# Altium PCB PCB1.PcbDoc
Units mil, origin at the board's own origin, x right, y up, seen from the top; angles counter-clockwise.
Board outline 2047.24 x 905.51 mil, 2 copper layers (Top Layer, Bottom Layer); 37 components, 52 nets, 212 pads, 54 vias.
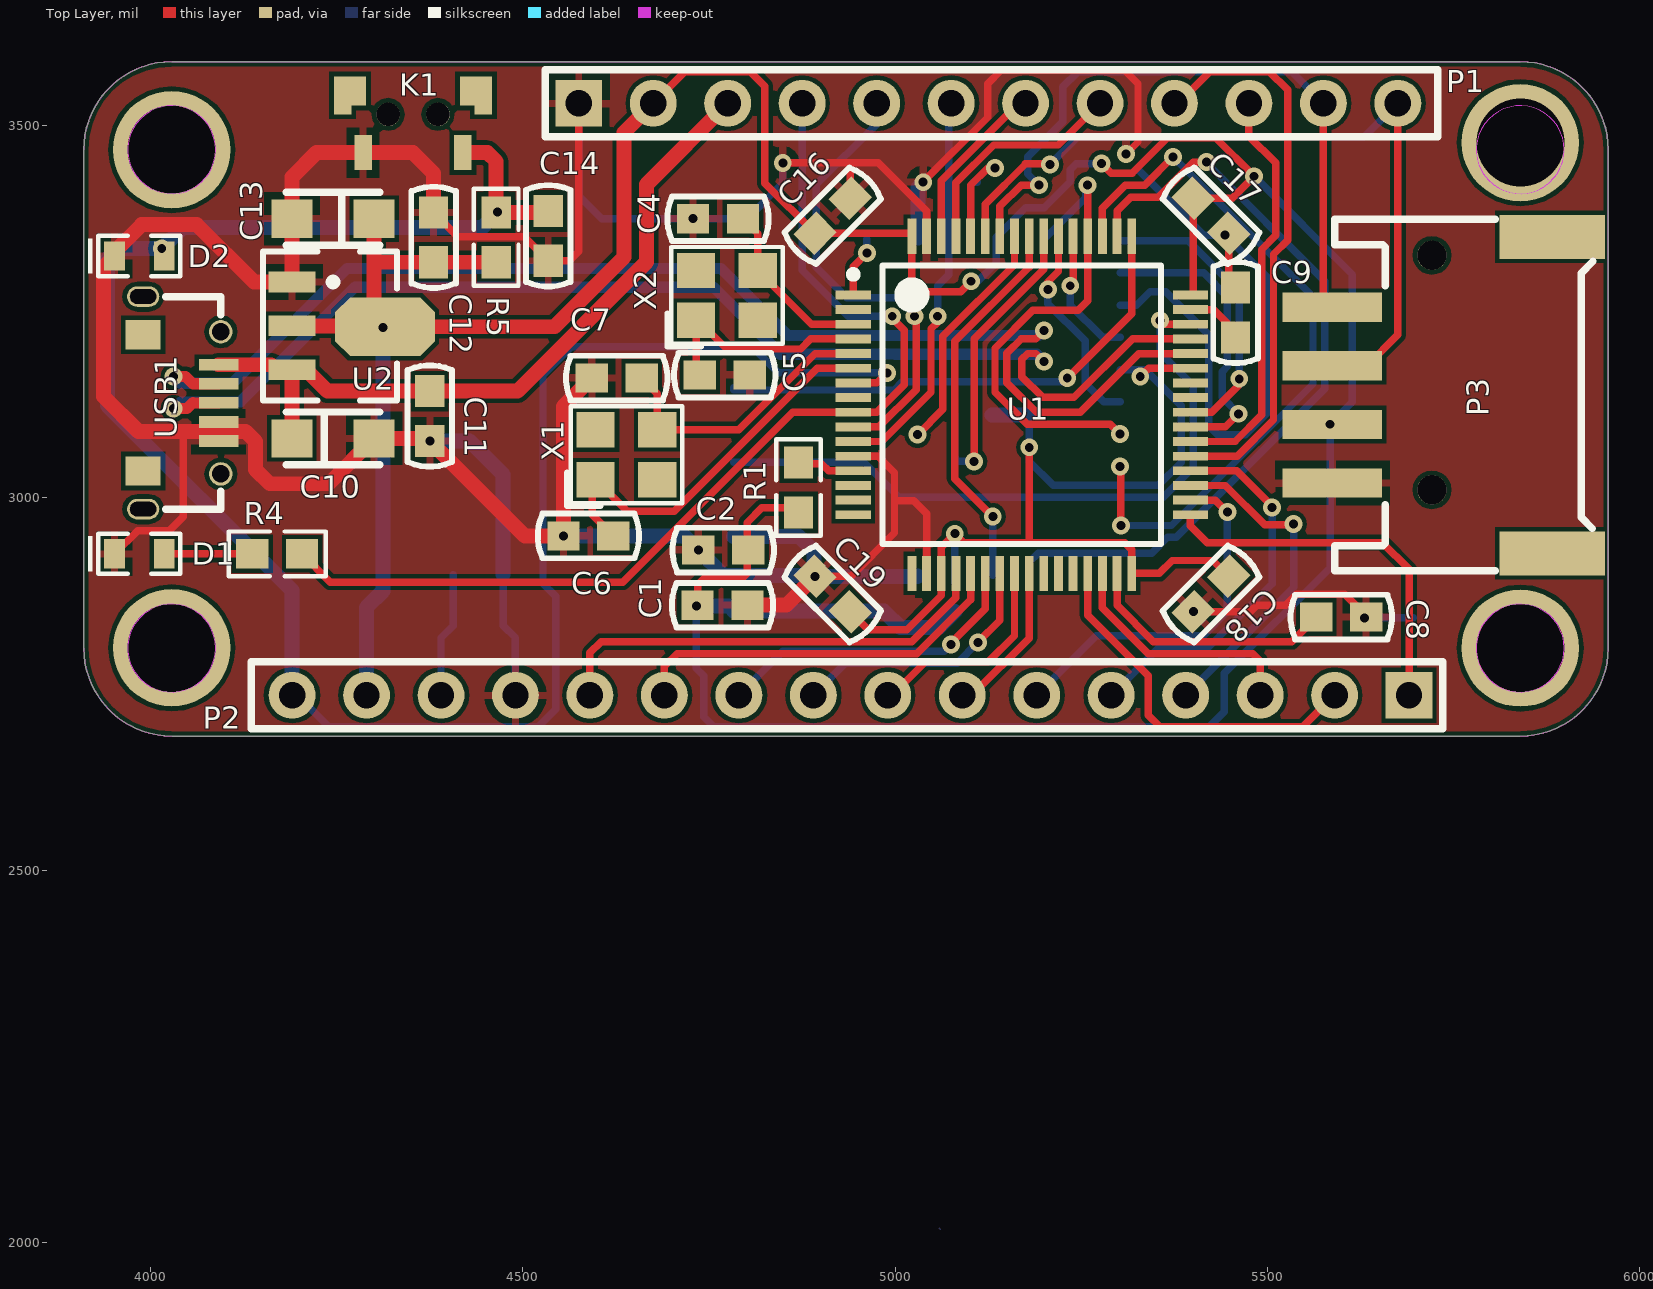
[diagram p0: Top Layer view]
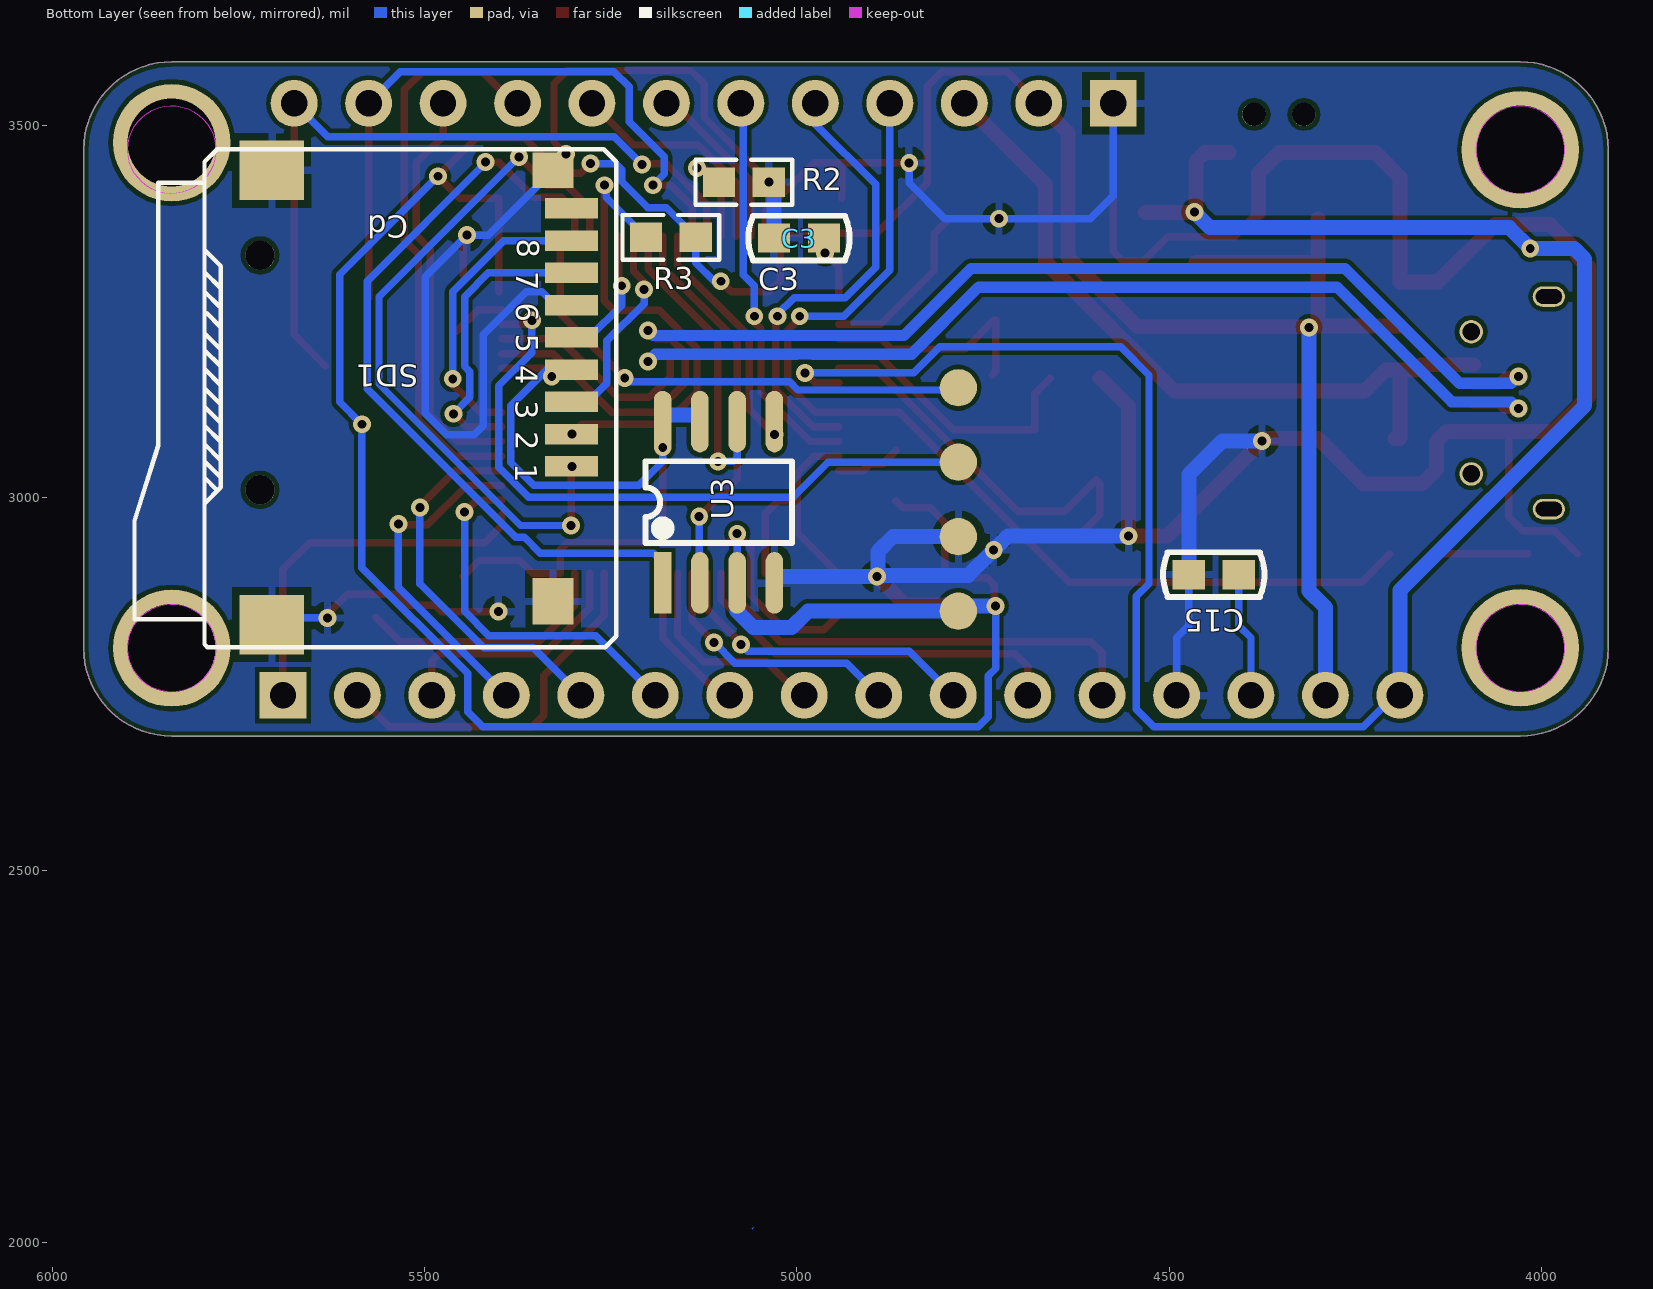
[diagram p1: Bottom Layer view, seen from below]
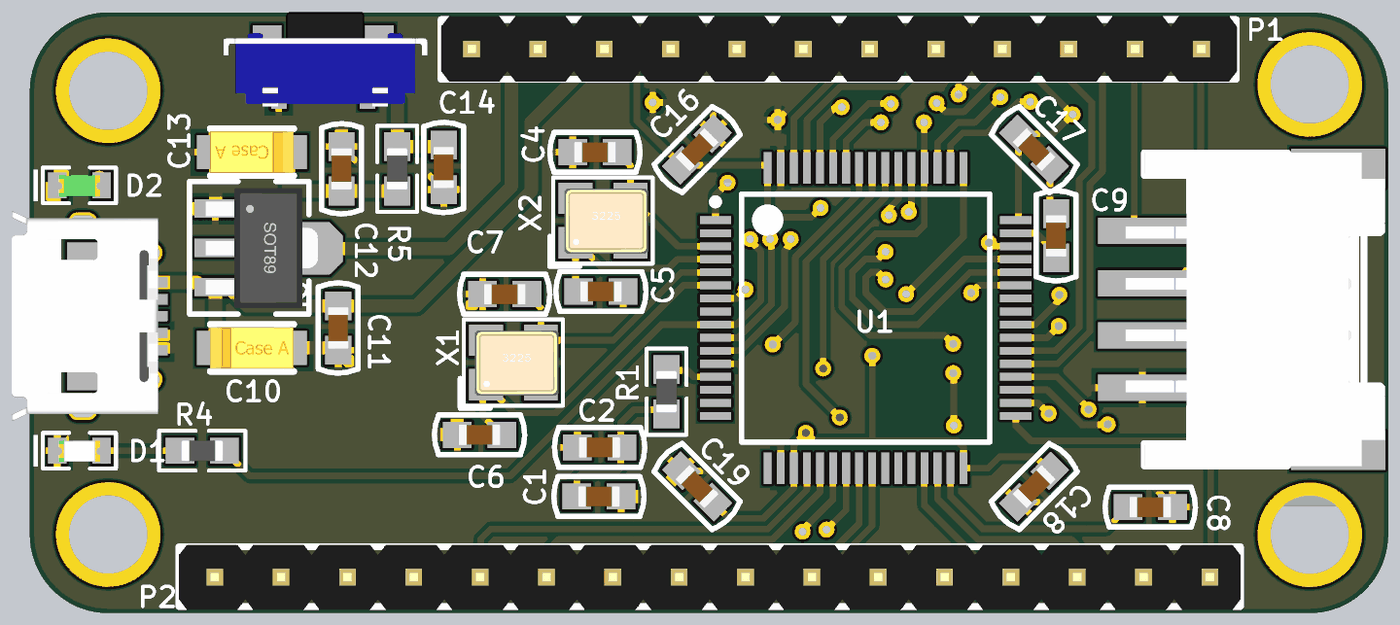
[diagram p2: 3D render of the assembled board from above, using the file's embedded part models]
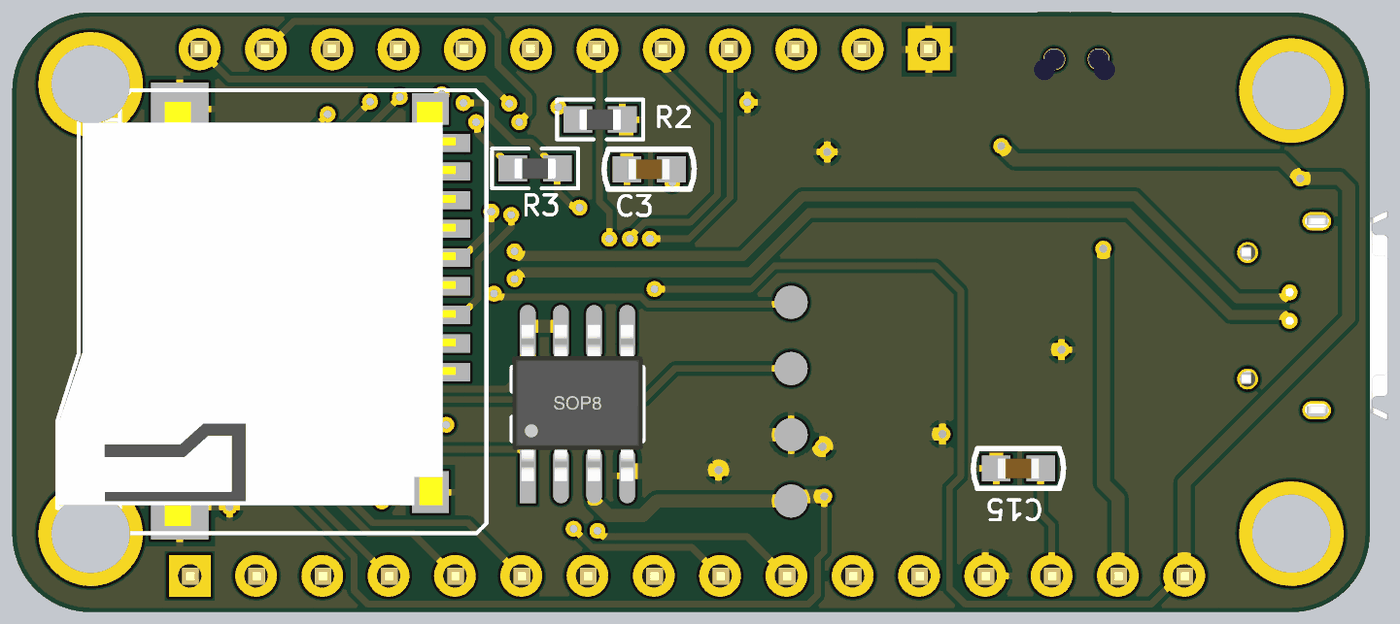
[diagram p3: 3D render of the assembled board from below, using the file's embedded part models]

## Layer stack, top to bottom
Top Solder: solder mask 0.4, Solder Resist, Dk 3.5
Top Layer: signal copper 1.4
Dielectric 1: dielectric 12.6, FR-4, Dk 4.8
Bottom Layer: signal copper 1.4
Bottom Solder: solder mask 0.4, Solder Resist, Dk 3.5

## Board outline
3910.25,2798.36 ccw(c4028.36,2798.36) 4028.36,2680.25 5839.38,2680.25 ccw(c5839.38,2798.36) 5957.49,2798.36 5957.49,3467.65 ccw(c5839.38,3467.65) 5839.38,3585.76 4028.36,3585.76 ccw(c4028.36,3467.65) 3910.25,3467.65

## Design rules (kind name [scope] priority, off if disabled: settings)
Clearance [All] p1: gap=6
DiffPairsRouting [All] p1: maxlimit=10 minlimit=6 mostfreqgap=10 toplayer_minwidth=10 toplayer_maxwidth=15 toplayer_prefwidth=15 bottomlayer_minwidth=10 bottomlayer_maxwidth=15 bottomlayer_prefwidth=15 maxuncoupledlength=500
PolygonConnect [All] p1: connectstyle=Relief reliefconductorwidth=10 reliefentries=4 polygonreliefangle="90 Angle" airgapwidth=10
RoutingVias [All] p1: holewidth=12 width=24 viastyle="Through Hole" minholewidth=12 minwidth=24 maxholewidth=28 maxwidth=50
SolderMaskExpansion [All] p1: expansion=4
Width [All] p1: maxlimit=100 minlimit=6 preferedwidth=10
29 further rules are at their usual default settings.

## Classes and differential pairs
differential pair D: +D_P -D_N

## Components (designator, comment, footprint, x,y, rotation, side; value= is the part's Value field where it differs from the comment)
C1 "10uF" Cap-0603 4768,2856 r0 top
C2 "104" Cap-0603 4769,2930 r180 top
C3 "0.1uF" Cap-0603 4997,3349 r180 bottom
C4 "22pF" Cap-0603 4762,3375 r0 top
C5 "22pF" Cap-0603 4771,3165 r0 top
C6 "22pF" Cap-0603 4588,2949 r180 top
C7 "22pF" Cap-0603 4626,3161 r0 top
C8 "10uF" Cap-0603 5599,2840 r180 top
C9 "10uF" Cap-0603 5457,3249 r270 top
C10 "100uf" CAP_TAN_3216_A 4245,3080 r180 top
C11 "104" Cap-0603 4375,3110 r90 top
C12 "104" Cap-0603 4380,3350 r270 top
C13 "100uf" CAP_TAN_3216_A 4245,3375 r0 top
C14 "105" Cap-0603 4534,3352 r90 top
C15 "1uf" Cap-0603 4440,2897 r180 bottom
C16 "104" Cap-0603 4916,3379 r225 top
C17 "104" Cap-0603 5424,3379 r135 top
C18 "104" Cap-0603 5424,2871 r45 top
C19 "104" Cap-0603 4916,2871 r315 top
D1 "LED_SMD_WHITE" LED_0603_W 3985,2925 r0 top
D2 "LED_SMD_BLUE" LED_0603_B 3985,3325 r0 top
K1 "KEY" SW-SMD-2X4 4319,3515 r0 top
P1 "Header_12" "Header 2.54X12" 5125,3530 r0 top
P2 "Header_16" "Header 2.54X16" 4940,2735 r180 top
P3 "HY2.0_P4" HY2.0_P4 5587,3020 r90 top
R1 "10K" Res-0603 4870,3014 r90 top
R2 "10K" Res-0603 5071,3424 r0 bottom
R3 "10K" Res-0603 5169,3350 r180 bottom
R4 "470R" Res-0603 4170,2925 r180 top
R5 "1K" Res-0603 4464,3350 r90 top
SD1 "SD-CARD" SD-CARD-Micro 5705,3440 r270 bottom
U1 "STM32F405RGT6" TQFP64_V 5170,3125 r0 top
U2 "AMS1117" SOT89 4190,3290 r270 top
U3 "25Q16CTIG" SOP8_M 5180,2886 r90 bottom
USB1 "USB-MICRO" USB-MICRO-SMD_C 3990,2985 r90 top
X1 "8M" "OSC 3225-4P" 4639,3058 r0 top
X2 "32.768M" "OSC 3225-4P" 4774,3272 r0 top

## Footprints (in the part's own frame and the unit in brackets; to place one, negate y for a bottom-side part, rotate by r counter-clockwise, add the part's x,y. Pads: shape width x height; smd on the part's side, far side on the other; paste and mask are expansions set on the pad)
Cap-0603 [mm]
  rect 1.1x1 smd: 1(-0.85,0) 2(0.85,0)
  silkscreen extent -1.73,-0.76 1.73,0.76, body extent -0.8,-0.4 0.8,0.4, height 0.6
CAP_TAN_3216_A [mm]
  rect 1.4x1.3 smd: 1(1.4,0) 2(-1.4,0)
  silkscreen extent -1.6,-0.9 1.6,0.9, body extent -1.6,-0.8 1.6,0.8, height 1.6
"Header 2.54X12" [mm]
  rect 1.6x1.6 hole 0.9: 1(-13.97,0)
  round 1.6 hole 0.9: 2(-11.43,0) 3(-8.89,0) 4(-6.35,0) 5(-3.81,0) 6(-1.27,0) 7(1.27,0) 8(3.81,0) 9(6.35,0) 10(8.89,0) 11(11.43,0) 12(13.97,0)
  silkscreen extent -15.11,-1.14 15.33,1.14, body extent -15.11,-1.23 15.37,1.27, height 8.3
"Header 2.54X16" [mm]
  rect 1.6x1.6 hole 0.9: 1(-19.05,0)
  round 1.6 hole 0.9: 2(-16.51,0) 3(-13.97,0) 4(-11.43,0) 5(-8.89,0) 6(-6.35,0) 7(-3.81,0) 8(-1.27,0) 9(1.27,0) 10(3.81,0) 11(6.35,0) 12(8.89,0) 13(11.43,0) 14(13.97,0) 15(16.51,0) 16(19.05,0)
  silkscreen extent -20.19,-1.14 20.45,1.14, body extent -20.19,-1.23 20.45,1.27, height 8.3
HY2.0_P4 [mm]
  rect 1x3.4 smd: 1(0,0) 2(2,0) 3(4,0) 4(6,0)
  rect 1.5x3.6 smd: 5(-2.4,-7.5) 5(8.4,-7.5)
  silkscreen extent -3,-8.89 8.99,-0.08, body extent -3,-9.3 9,0.65, height 5
LED_0603_B [mm]
  rect 0.7x1 smd: 1(-0.85,0) 2(0.85,0)
  silkscreen extent -1.75,-0.69 1.4,0.69, body extent -0.8,-0.42 0.8,0.38, height 0.61
LED_0603_W [mm]
  rect 0.7x1 smd: 1(-0.85,0) 2(0.85,0)
  silkscreen extent -1.75,-0.69 1.4,0.69, body extent -0.8,-0.42 0.8,0.38, height 0.61
"OSC 3225-4P" [mm]
  rect 1.3x1.2 smd: 1(-1.05,-0.85) 2(1.05,-0.85) 3(1.05,0.85) 4(-1.05,0.85)
  silkscreen extent -2.03,-1.75 1.91,1.65, body extent -1.47,-1.27 1.73,1.23, height 0.7
Res-0603 [mm]
  rect 1.1x1 smd: 1(-0.85,0) 2(0.85,0)
  silkscreen extent -1.65,-0.76 1.65,0.76, body extent -0.8,-0.4 0.8,0.4, height 0.38
SD-CARD-Micro [mm]
  rect 2.032x2.2 smd: 0(0,0) 0(15.5,0)
  rect 1.2x1.4 smd: 0(0,9.6)
  round 1 hole 1 unplated: 0(2.9,-0.4) 0(10.9,-0.4)
  rect 1.6x1.4 smd: 0(14.7,9.6)
  rect 0.7x1.8 smd: 1(10.1,10.227) 2(9,10.227) 3(7.9,10.227) 4(6.8,10.227) 5(5.7,10.227) 6(4.6,10.227) 7(3.5,10.227) 8(2.4,10.227) 9(1.3,10.227)
  Top Layer lines w0.03: 36.064,16.423 36.114,16.373
  silkscreen extent -0.72,-4.68 16.27,11.75, body extent -0.27,-4.63 16,10.57, height 1.8
SOP8_M [mm]
  rect 2.1x0.6 smd: 1(0,0)
  oval 2.1x0.6 smd: 2(0,-1.27) 3(0,-2.54) 4(0,-3.81) 5(5.5,-3.81) 6(5.5,-2.54) 7(5.5,-1.27) 8(5.5,0)
  silkscreen extent 1.35,-4.41 4.15,0.6, body extent -0.21,-4.4 5.8,0.6, height 1.9
SOT89 [mm]
  rect 0.7x1.6 smd: 1(0,0) 2(1.5,-0.003) 3(3,0)
  oct 2x3.4 smd: 2(1.525,3.172)
  silkscreen extent -1.04,-0.99 4.04,3.58, body extent -0.79,-0.37 3.81,3.93, height 1.6
SW-SMD-2X4 [mm]
  rect 0.6x1.3 smd: 0(-1.55,0.65) 0(3.25,0.65)
  rect 0.6x1 smd: 0(-1.05,0.8) 0(2.75,0.8)
  round 0.8 hole 0.8: 0(0,0) 0(1.7,0)
  rect 0.6x1.2 smd: 1(-0.85,-1.3) 3(2.55,-1.3)
  body extent -2.97,-1.8 4.83,1.8, height 3.5
TQFP64_V [mm] "Thin QFP, 64-Leads, Body 10x10mm, Pitch 0.5mm, ST Recommended"
  rect 1.2x0.3 smd: 1(-5.75,3.75) 2(-5.75,3.25) 3(-5.75,2.75) 4(-5.75,2.25) 5(-5.75,1.75) 6(-5.75,1.25) 7(-5.75,0.75) 8(-5.75,0.25) 9(-5.75,-0.25) 10(-5.75,-0.75) 11(-5.75,-1.25) 12(-5.75,-1.75) 13(-5.75,-2.25) 14(-5.75,-2.75) 15(-5.75,-3.25) 16(-5.75,-3.75) 33(5.75,-3.75) 34(5.75,-3.25) 35(5.75,-2.75) 36(5.75,-2.25) 37(5.75,-1.75) 38(5.75,-1.25) 39(5.75,-0.75) 40(5.75,-0.25) 41(5.75,0.25) 42(5.75,0.75) 43(5.75,1.25) 44(5.75,1.75) 45(5.75,2.25) 46(5.75,2.75) 47(5.75,3.25) 48(5.75,3.75)
  rect 0.3x1.2 smd: 17(-3.75,-5.75) 18(-3.25,-5.75) 19(-2.75,-5.75) 20(-2.25,-5.75) 21(-1.75,-5.75) 22(-1.25,-5.75) 23(-0.75,-5.75) 24(-0.25,-5.75) 25(0.25,-5.75) 26(0.75,-5.75) 27(1.25,-5.75) 28(1.75,-5.75) 29(2.25,-5.75) 30(2.75,-5.75) 31(3.25,-5.75) 32(3.75,-5.75) 49(3.75,5.75) 50(3.25,5.75) 51(2.75,5.75) 52(2.25,5.75) 53(1.75,5.75) 54(1.25,5.75) 55(0.75,5.75) 56(0.25,5.75) 57(-0.25,5.75) 58(-0.75,5.75) 59(-1.25,5.75) 60(-1.75,5.75) 61(-2.25,5.75) 62(-2.75,5.75) 63(-3.25,5.75) 64(-3.75,5.75)
  silkscreen extent -5.87,-4.75 4.75,4.75, body extent -5,-5 5,5, height 1.6
USB-MICRO-SMD_C [mm]
  oval 0.7x1.1 hole 0.5 slot 0.9 at 90 deg: 0(0,0) 0(7.25,0)
  round 0.8 hole 0.6: 0(1.2,-2.65) 0(6.05,-2.65)
  rect 1x1.2 smd: 0(1.3,0) 0(5.95,0)
  rect 0.4x1.35 smd: 1(4.925,-2.575) 2(4.275,-2.575) 3(3.625,-2.575) 4(2.975,-2.575) 5(2.325,-2.575)
  silkscreen extent 0,-2.65 7.24,-0.76, body extent -0.37,-2.87 7.63,2.73, height 2.8

## Part data
C1 C2 C3 C4 C5 C6 C7 C8 C9: library part CAP, "贴片陶瓷电容"
C10 C13: library part tan_cap
C11 C12 C14 C15 C16 C17 C18 C19: library part CAP
D1 D2: "发光二极管"
R1 R2 R3 R4 R5: library part RES, "贴片电阻"
U1: "ARM Cortex-M4 32b MCU+FPU, 210DMIP, 1024 kB Flash, 192+4 kB RAM, 51 I/Os, 64-pin LQFP, -40 to +85癈, Tray"
X1 X2: library part XTAL-4P, "4脚无源晶振"

## Free pads (board coordinates)
  round 157.48 hole 118.11: 1(4028.35,2798.7) 1(4028.35,3467.64) 1(5839.37,2798.35) 1(5839.37,3477.17)
  round 50 smd far side: 1(4783,3148) 2(4783,3048) 3(4783,2948) 4(4783,2848)

## Via types
v1: diameter 24, hole 12, Top Layer to Bottom Layer, 54 vias

## Nets (pads, with @x,y where several pads share a name; then routed paths per layer and width w, separated by ;. In a path a pad name is that pad's centre, name@x,y a point inside that pad or via, vN(x,y) a via of type N, cw(c..) or ccw(c..) an arc to the next point about the centre after c; other vN are vias at no path point)
3.3V: C1.1 C2.1 C12.2 C13.1 C16.2 C17.2 C18.2 C19.2 P1.2 P2.15 P3.2 pad.4 R1.1 R3.2 R5.1 SD1.4 U1.19 U1.32 U1.43 U1.48 U1.64 U2.2 U3.3 U3.7 U3.8 | length 6670
  Top Layer w10: P1.2 4717.5,3572.5 4805.5,3572.5 4825,3553 4825,3422.67 C16.2 U1.64@5018.4,3355.34 ; C1.1 4734.54,2883.54 4744,2893 4795,2893 4801,2899 4801,2967 4821,2987 4857.46,2987 R1.1@4867,2996.54 ; C19.2 4964,2823 5015.75,2823 5061.73,2868.99 U1.19 5061.73,2933.73 v1(5080,2952) 5092,2940 5180,2940 ; U1.64 5022.36,3291.64 5037,3277 5088,3277 v1(5102,3291) ; v1(5180,3068) 5180,2940 ; v1(5277,3449) 5290,3436 5318,3436 5366,3484 5430,3484 v1(5482,3432) 5452.66,3402.66 C17.2 U1.48@5400.34,3276.6 ; v1(5329,3163) 5340.21,3174.21 U1.43 ; C18.2 5426.33,2916 5372,2916 5354.62,2898.62 U1.32 5317.64,2930.36 5308,2940 5180,2940
  Top Layer w20: U2.2@4189.87,3230.94 U2.2@4300.12,3230.94 ; U2.2@4300.12,3244.7 4300.12,3317 ; C13.1 4300.12,3317 ; U2.2@4314.87,3229.94 4542.34,3229.94 4636,3323.61 4636,3491 P1.2 ; R5.1 C12.2 4300.58,3316.54 4300.12,3317
  Bottom Layer w10: v1(4733,2855) 4733,2771 4743,2761 4743,2706 4756.5,2692.5 5421.5,2692.5 5442,2713 5442,2764.37 5584,2906.37 v1(5584,3099) 5614,3129 5614,3300 v1(5482,3432) ; U3.3 v1(5080,2952) ; v1(5102,3291) 5111,3291 5135.54,3315.54 R3.2 5175.54,3390 5200,3390 5235,3425 5235,3441 5243,3449 v1(5277,3449) ; U3.8 v1(5180,3068) 5180,3049 5212,3017 5353.37,3017 5384,3047.63 5384,3124 5335.72,3172.28 SD1.4
  Bottom Layer w20: P2.15 4290,2853 4312,2875 v1(4312,3229) ; v1(4733,2855) pad.4@4776,2855 ; pad.4 4985,2848 5007,2826 5058.4,2826 U3.3@5080,2847.6 ; U3.7@5130,3111.54 U3.8@5180,3111.54
A0: P2.12 U1.20 | length 611.7
  Top Layer w10: P2.12 4590,2792 4605,2807 5022.37,2807 5081.42,2866.04 U1.20
A1: P2.11 U1.21 | length 522.5
  Top Layer w10: P2.11 4690,2774 4707,2791 5029,2791 5101.1,2863.1 U1.21
A2: P2.10 U1.22 | length 431.5
  Top Layer w10: v1(5075,2803) 5072.37,2803 5120.79,2851.41 U1.22
  Bottom Layer w10: P2.10 4849,2794 5066,2794 v1(5075,2803)
A3: P2.9 U1.23 | length 355.2
  Top Layer w10: v1(5111,2806) 5140.47,2835.47 U1.23
  Bottom Layer w10: P2.9 4933,2778 5083,2778 v1(5111,2806)
A4: P2.8 U1.24 | length 286.8
  Top Layer w10: P2.8 4995.63,2735 5040.63,2780 5125,2780 5160.16,2815.16 U1.24
A5: P2.7 U1.25 | length 208.5
  Top Layer w10: P2.7 5103,2735 5179.84,2811.84 U1.25
AREF: C15.2 P2.14 | length 168.8
  Bottom Layer w10: P2.14 4390,2812 4406.54,2828.54 C15.2
BOOT0: R2.2 U1.60 | length 116.6
  Top Layer w10: U1.60 5101.1,3420.1 5124,3443 v1(5134,3443)
  Bottom Layer w10: R2.2 R2.2@5110,3424
D4: P2.1 U1.33 | length 501.6
  Top Layer w10: U1.33 5396.38,2962.62 5419,2940 5654,2940 5690,2904 P2.1
D5: P1.10 U1.38 | length 551.7
  Top Layer w10: U1.38 5456.31,3075.79 5492,3111.47 5492,3333.63 5511,3352.63 5511,3450 5475,3486 P1.10
D6: P1.9 U1.37 | length 762.6
  Top Layer w10: P1.9 5380,3530 5422.5,3572.5 5502.5,3572.5 5527,3548 5527,3346 5508,3327 5508,3104.85 5459.26,3056.1 U1.37
D8_NEOPIX: U1.8
D9: P1.8 U1.61 | length 309.6
  Top Layer w10: U1.61 5081.42,3423.04 5132.37,3474 5219,3474 P1.8
D10: P1.7 U1.62 | length 231
  Top Layer w10: U1.62 5061.73,3425.99 5165.75,3530 P1.7
D11: P1.6 U1.11 | length 533
  Top Layer w10: U1.11 4981.79,3075.79 5048,3142 5048,3227 5057,3236 v1(5057,3244) v1@5057,3246
  Bottom Layer w10: v1(5057,3244) 5057,3285 5071.81,3299.81 5071.81,3526.81 P1.6
D12: P1.5 U1.10 | length 619.1
  Top Layer w10: U1.10 4978.1,3095.47 5028,3145.37 5028,3242 v1(5026,3244)
  Bottom Layer w10: P1.5 4975,3502 4894,3421 4894,3309.63 4934.63,3269 5003.53,3269 5026,3246.53 v1(5026,3244)
D13: P1.4 R4.1 U1.9 | length 1410.4
  Top Layer w10: R4.1 4241.46,2887 4634,2887 4862.16,3115.16 U1.9 4975.16,3115.16 5012,3152 5012,3225.47 4996,3241.47 v1(4996,3244)
  Bottom Layer w10: P1.4 4875,3306 4937,3244 v1(4996,3244) v1@5003,3244
D_N: U1.44 USB1.2 | length 1739.3
  Top Layer w10: v1(5200,3225) 5189,3214 5169.51,3214 5150,3194.49 5150,3154.72 5189.72,3115 5248.28,3115 5327.18,3193.9 U1.44
  Top Layer w15: v1(4031,3163) 4047.02,3163 4057.01,3153.01 4057.3,3153.31 USB1.2
  Bottom Layer w15: v1(4031,3163) 4040,3154 4110,3154 4264,3308 4766,3308 4856,3218 5193,3218 v1(5200,3225)
D_P: U1.45 USB1.3 | length 1673.8
  Top Layer w10: v1(5200,3183) 5189,3194 5177.79,3194 5170,3186.21 5170,3163 5198,3135 5240,3135 5318.9,3213.9 U1.45@5396.38,3213.9
  Top Layer w15: v1(4031,3120) 4049,3120 4057.01,3128.01 4057.3,3127.72 USB1.3
  Bottom Layer w15: v1(4031,3120) 4040,3129 4120.36,3129 4274.36,3283 4755.64,3283 4845.64,3193 4977.94,3193 4978.44,3193.5 4999.56,3193.5 5000.06,3193 5190,3193 v1(5200,3183)
FLASH_CS: U1.50 U3.1 | length 1064
  Top Layer w10: U1.50 5297.95,3385.95 5316,3404 5353,3404 5400,3451 v1(5418,3451)
  Bottom Layer w10: U3.1@5180,2895 5180,2914 5192,2926 5344.63,2926 5365.63,2947 5377.63,2947 5577,3146.37 5577,3291 v1@5417.5,3450.5
FLASH_MISO: U1.56 U3.2 | length 517.9
  Top Layer w10: v1(5131,2975) 5080,3026 5080,3210.25 5179.84,3310.1 U1.56
  Bottom Layer w10: U3.2@5131,2896 v1(5131,2975)
FLASH_MOSI: U1.57 U3.5 | length 320.3
  Top Layer w10: v1(5030,3085) 5064,3119 5064,3216.88 5160.16,3313.04 U1.57
FLASH_SCK: U1.55 U3.6 | length 426.7
  Top Layer w10: v1(5106,3049) 5106,3213.63 5199.53,3307.16 U1.55
  Bottom Layer w10: U3.6@5080,3111.54 5080,3054 5085,3049 v1(5106,3049)
GND: C1.2 C2.2 C3.1 C4.1 C5.2 C6.2 C7.1 C8.1 C9.1 C10.2 C11.1 C12.1 C13.2 C14.1 C15.1 C16.1 C17.1 C18.1 C19.1 D1.1 D2.1 K1.1 P1.1 P2.13 P3.1 pad.3 R2.1 SD1.0@5327.05,2861.26 SD1.0@5327.05,3440 SD1.0@5705,2829.76 SD1.0@5705,3440 SD1.6 U1.12 U1.18 U1.63 U2.1 U3.4 USB1.4 USB1.5 | length 6589.3
  Top Layer w10: D1.1 3982.54,2956 4025,2956 4044,2975 4044,3086.33 ; C12.1 4412.65,3350.81 4501.72,3350.81 C14.1 4562.54,3318.54 4575,3331 P1.1 ; v1(4849,3450) 4977,3450 5042.05,3384.95 U1.63 ; v1(4892.34,2894.66) 4940.66,2894.66 4999,2953 4999,2996 ; C16.1 4939.66,3449.34 ; U1.12 4976.9,3056.1 4999,3034 4999,2996 ; v1(5037.54,3424) 5037.54,3424.42 5124,3510.88 5124,3556 5142,3574 5308,3574 5326,3556 5326,3478 v1(5310,3462) ; U1.18 5042.05,2978.95 5025,2996 4999,2996 ; v1(5400.34,2847.34) 5476.71,2847.34 5485.37,2856 5524.64,2856 5539.33,2870.69 5603.69,2870.69 C8.1@5632.46,2841.91 ; C9.1@5447.66,3299.8 C17.1
  Top Layer w20: C13.2 4189.88,3430.88 4222.82,3463.82 K1.1 4352.18,3463.82 4380,3436 C12.1 ; C13.2@4190,3374.88 U2.1 4139,3290 4062,3367 3988,3367 3951.54,3330.54 D2.1 3937,3310.46 3937,3136 3983.67,3089.33 4127.67,3089.33 4141,3076 4141,3038 4160,3019 4239.12,3019 C10.2 C11.1@4371.54,3080 ; v1(4375,3076.54) 4502.54,2949 v1(4554.54,2949) 4554.54,3123 C7.1 ; C1.2 4853.67,2856 v1(4892.34,2894.66)
  Bottom Layer w10: C15.1 4473.46,2828.54 4490,2812 P2.13 ; P1.1 4575,3406 4606,3375 v1(4728.54,3375) 4801,3375 4849,3423 v1(4849,3450) ; SD1.6 5324.02,3258.9 5342.12,3277 5363,3277 5421,3219 5421,3097 5433.19,3084.81 5470.19,3084.81 5499,3113.63 5499,3297 v1(5443,3353) 5414.05,3353 SD1.0@5327.05,3440 ; SD1.0@5310,3457.05 v1(5310,3462) ; v1(5630,2839) SD1.0@5695.76,2839
  Bottom Layer w20: v1(4375,3076.54) 4428.46,3076.54 4473.46,3031.54 C15.1 ; v1(4554.54,2949) 4716.54,2949 v1(4735.54,2930) 4769.54,2896 v1@4891,2896 ; pad.3 4871,2948 4891,2928 v1@4891,2896 ; U3.4@5030,2895 5029.66,2894.66 v1(4892.34,2894.66) v1@4891,2896 ; C3.1 R2.1@5030.46,3416.93
MISO: P2.4 U1.35 | length 450.7
  Top Layer w10: U1.35 5443.27,3016.73 5496,2964 5534,2964 v1(5534.93,2964.93)
  Bottom Layer w10: P2.4 5534.93,2879.93 v1(5534.93,2964.93)
MOSI: P2.5 U1.36 | length 512.2
  Top Layer w10: U1.36 5458.58,3036.42 5507,2988 v1(5506,2987)
  Bottom Layer w10: P2.5 5354,2799 5420,2799 5506,2885 v1(5506,2987)
NetC4_2: C4.2 U1.3 X2.3 | length 236
  Top Layer w10: C4.2 4815.34,3355.13 X2.3 4887.54,3233.27 U1.3
NetC5_1: C5.1 U1.4 X2.1 | length 308.1
  Top Layer w10: C5.1 4732.66,3169.87 X2.1 4735.46,3238.54 4774,3200 4873,3200 4886.58,3213.58 U1.4
NetC6_1: C6.1 U1.6 X1.1 | length 532.5
  Top Layer w10: C6.1 4593,2977.46 4593,3019.87 X1.1 4640.2,2982 4703,2982 4895.21,3174.21 U1.6
NetC7_2: C7.2 U1.5 X1.3 | length 383.9
  Top Layer w10: C7.2 4680.34,3140.13 X1.3 4789.84,3091.46 4892.27,3193.9 U1.5
NetC8_2: C8.2 U1.31 | length 344.3
  Top Layer w10: U1.31 5297.95,2855.67 5346.52,2807.11 5532.64,2807.11 C8.2
NetC9_2: C9.2 U1.47 | length 72.8
  Top Layer w10: U1.47 5427.58,3252.95 C9.2@5457,3223.54
NetD1_2: D1.2 R4.2 | length 118.1
  Top Layer w10: D1.2 R4.2
NetR1_2: R1.2 U1.13 | length 87.8
  Top Layer w10: R1.2@4867,3063.46 4884.46,3046 4901,3046 4910.58,3036.42 U1.13
NRST: C14.2 D2.2 K1.3 P2.16 R5.2 U1.7 | length 2805.4
  Top Layer w10: U1.7 4975.53,3154.53 v1(4989,3168)
  Top Layer w20: K1.3 4452.18,3463.82 4464,3452 R5.2 C14.2@4532,3383.46
  Bottom Layer w10: P2.16 4197,2735 4239.5,2692.5 4520.5,2692.5 4544,2716 4544,2868 4527,2885 4527,3165 4565,3203 4808,3203 4843,3168 v1(4989,3168)
  Bottom Layer w20: P2.16 4190,2876 3942,3124 3942,3321 3956,3335 v1(4015,3335) 4043,3363 4445,3363 v1(4466,3384)
RX_D0: P2.3 U1.30 | length 333.3
  Top Layer w10: U1.30 5278.27,2852.73 5340,2791 5480,2791 5490,2781 P2.3
SCK: P2.6 U1.34 | length 492.3
  Top Layer w10: U1.34 5429.95,2997.05 v1(5446,2981)
  Bottom Layer w10: P2.6 5270,2815 5413.37,2815 5446,2847.63 v1(5446,2981)
SCL: P1.11 P3.4 U1.58 | length 900
  Top Layer w10: U1.58 5140.47,3391.47 5169,3420 v1(5193,3420) ; P3.4@5575,3268.22 P1.11
  Bottom Layer w10: v1(5193,3420) 5178,3435 5178,3458 5225,3505 5225,3552 5245.5,3572.5 5532.5,3572.5 P1.11
SDA: P1.12 P3.3 U1.59 | length 1023.5
  Top Layer w10: U1.59 5120.79,3394.41 5174.87,3448.5 5207.5,3448.5 v1(5208,3448) ; P3.3@5633.48,3177.48 5675,3219 P1.12
  Bottom Layer w10: v1(5208,3448) 5245,3485 5630,3485 P1.12
SDIO_CLK: SD1.5 U1.53 | length 186.2
  Top Layer w10: v1@5238,3280 5235,3283 v1(5235,3285) 5236,3285 5238.9,3287.9 U1.53
  Bottom Layer w10: v1(5235,3285) 5235,3259 5278.41,3215.59 SD1.5
SDIO_CMD: SD1.3 U1.54 | length 281.7
  Top Layer w10: v1(5205,3280) 5205,3290 5219.21,3304.21 U1.54
  Bottom Layer w10: v1(5205,3280) 5205,3261 5255,3211 5255,3154 5280.02,3128.98 SD1.3
SDIO_D0: SD1.7 U1.39 | length 398.1
  Top Layer w10: U1.39 5443.47,3095.47 v1(5461,3113)
  Bottom Layer w10: SD1.7 5414.17,3302.2 5446,3270.37 5446,3176.53 5439,3169.53 5439,3135 v1(5461,3113)
SDIO_D1: SD1.8 U1.40 | length 393.9
  Top Layer w10: U1.40 5425.16,3115.16 5462,3152 v1(5462,3160)
  Bottom Layer w10: SD1.8 5393.49,3345.51 5462,3277 v1(5462,3160)
SDIO_D2: SD1.1 U1.51 | length 960.1
  Top Layer w10: U1.51 5278.27,3389.27 5309,3420 5335,3420 v1(5373,3458) ; v1(5302,3042) 5303,3041 v1(5303,2963)
  Bottom Layer w10: v1(5303,2963) 5371,2963 5561,3153 5561,3270 v1(5373,3458)
SDIO_D3: R3.1 SD1.2 U1.52 | length 646.9
  Top Layer w10: v1(5258,3420) 5258.58,3419.42 U1.52 5258.58,3264.58 5246,3252 5184.88,3252 5134,3201.12 5134,3142 5177,3099 5289,3099 v1(5302,3086)
  Bottom Layer w10: R3.1 5255.93,3403.46 v1@5255.93,3417.93
SWC: pad.1@4783,3148 U1.49 | length 683.9
  Top Layer w10: v1(5231,3161) 5317.64,3247.64 U1.49
  Bottom Layer w10: pad.1@4783,3148 4783,3145 4998.53,3145 5009.53,3156 5226,3156 v1(5231,3161)
SWD: pad.2 U1.46 | length 919.5
  Top Layer w10: v1(5355.8,3238.55) 5355.45,3238.55 5352,3242 5360.73,3233.27 U1.46
  Bottom Layer w10: pad.2 4958,3048 5005,3001 5360,3001 5400,3041 5400,3151 5356,3195 v1@5356,3236
TX_D1: P2.2 U1.29 | length 498.4
  Top Layer w10: U1.29 5258.58,2842.42 5340,2761 5340,2708 5355.5,2692.5 5547.5,2692.5 P2.2
V_DIV: U1.17
VCC: C10.1 C11.2 P1.3 U2.3 USB1.1 | length 1018.5
  Top Layer w20: USB1.1 4162.1,3178.9 4169,3172 U2.3@4189.89,3172 ; C10.1@4197,3080 C10.1 U2.3@4189.88,3171.99 ; P1.3 4666,3421 4666,3316.84 4492.62,3143.46 C11.2 4237.54,3143.46 4209.11,3171.89 U2.3 U2.3@4189.89,3172
VDD: C3.2 U1.1 | length 82.4
  Top Layer w10: U1.1 4943.62,3310.62 v1(4962,3329)
  Bottom Layer w10: v1(4962,3329) C3.2@4962,3347.46
pads on no net: K1.0 P3.5 SD1.0@5720.75,3010.87 SD1.0@5720.75,3325.83 SD1.9 U1.2 U1.14 U1.15 U1.16 U1.26 U1.27 U1.28 U1.41 U1.42 USB1.0 X1.2 X1.4 X2.2 X2.4

## Polygon pours and split planes (outlines as drawn)
GND on Bottom Layer "Top Layer-No Net" (solid, remove dead copper, pour order 12): 3725,3845 3669,3789 3669,2101 6493,2101 6630,2238 6539,2329 6539,3795
GND on Top Layer "Top Layer-No Net" (solid, remove dead copper, pour order 14): 3610,3764 3610,2377 3816,2171 3974,2329 6633,2329 6633,3690 6370,3953

## Keep-outs
Keep-Out Layer:
  circle w0.5: c4028.36,3467.65 r59.06
  circle w0.5: c5839.38,3467.65 r59.06
  circle w0.5: c5839.38,2798.36 r59.06
  circle w0.5: c4028.36,2798.36 r59.06
  lines w0.5: 3910.25,2798.36 ccw(c4028.36,2798.36) 4028.36,2680.25 5839.38,2680.25 ccw(c5839.38,2798.36) 5957.49,2798.36 5957.49,3467.65 ccw(c5839.38,3467.65) 5839.38,3585.76 4028.36,3585.76 ccw(c4028.36,3467.65) 3910.25,3467.65 3910.25,2798.36

## Silkscreen, mask and mechanical layers (free items; w line width, h text height)
Bottom Overlay:
  text "C3" at 5052,3279 h30

## Text inside footprints (layer, text, board x,y; h text height)
SD1: Bottom Overlay "1" at 5378.36,3046.36 h30 r90; Bottom Overlay "2" at 5377.36,3089.36 h30 r90; Bottom Overlay "3" at 5377.36,3131.36 h30 r90; Bottom Overlay "4" at 5377.36,3178.36 h30 r90; Bottom Overlay "5" at 5376.36,3220.36 h30 r90; Bottom Overlay "6" at 5376.36,3262.36 h30 r90; Bottom Overlay "7" at 5376.36,3304.36 h30 r90; Bottom Overlay "8" at 5375.36,3348.36 h30 r90; Bottom Overlay "Cd" at 5522,3379 h30 r180